# Altium PCB РАЗВОДКА.PcbDoc (part 2 of 2)
Units mm, origin at the board's own origin, x right, y up, seen from the top; angles counter-clockwise.
Board outline 81.25 x 50.02 mm, 2 copper layers (Top Layer, Bottom Layer); 68 components, 46 nets, 302 pads, 66 vias.
Unrouted connection lines stored in the file: 1.
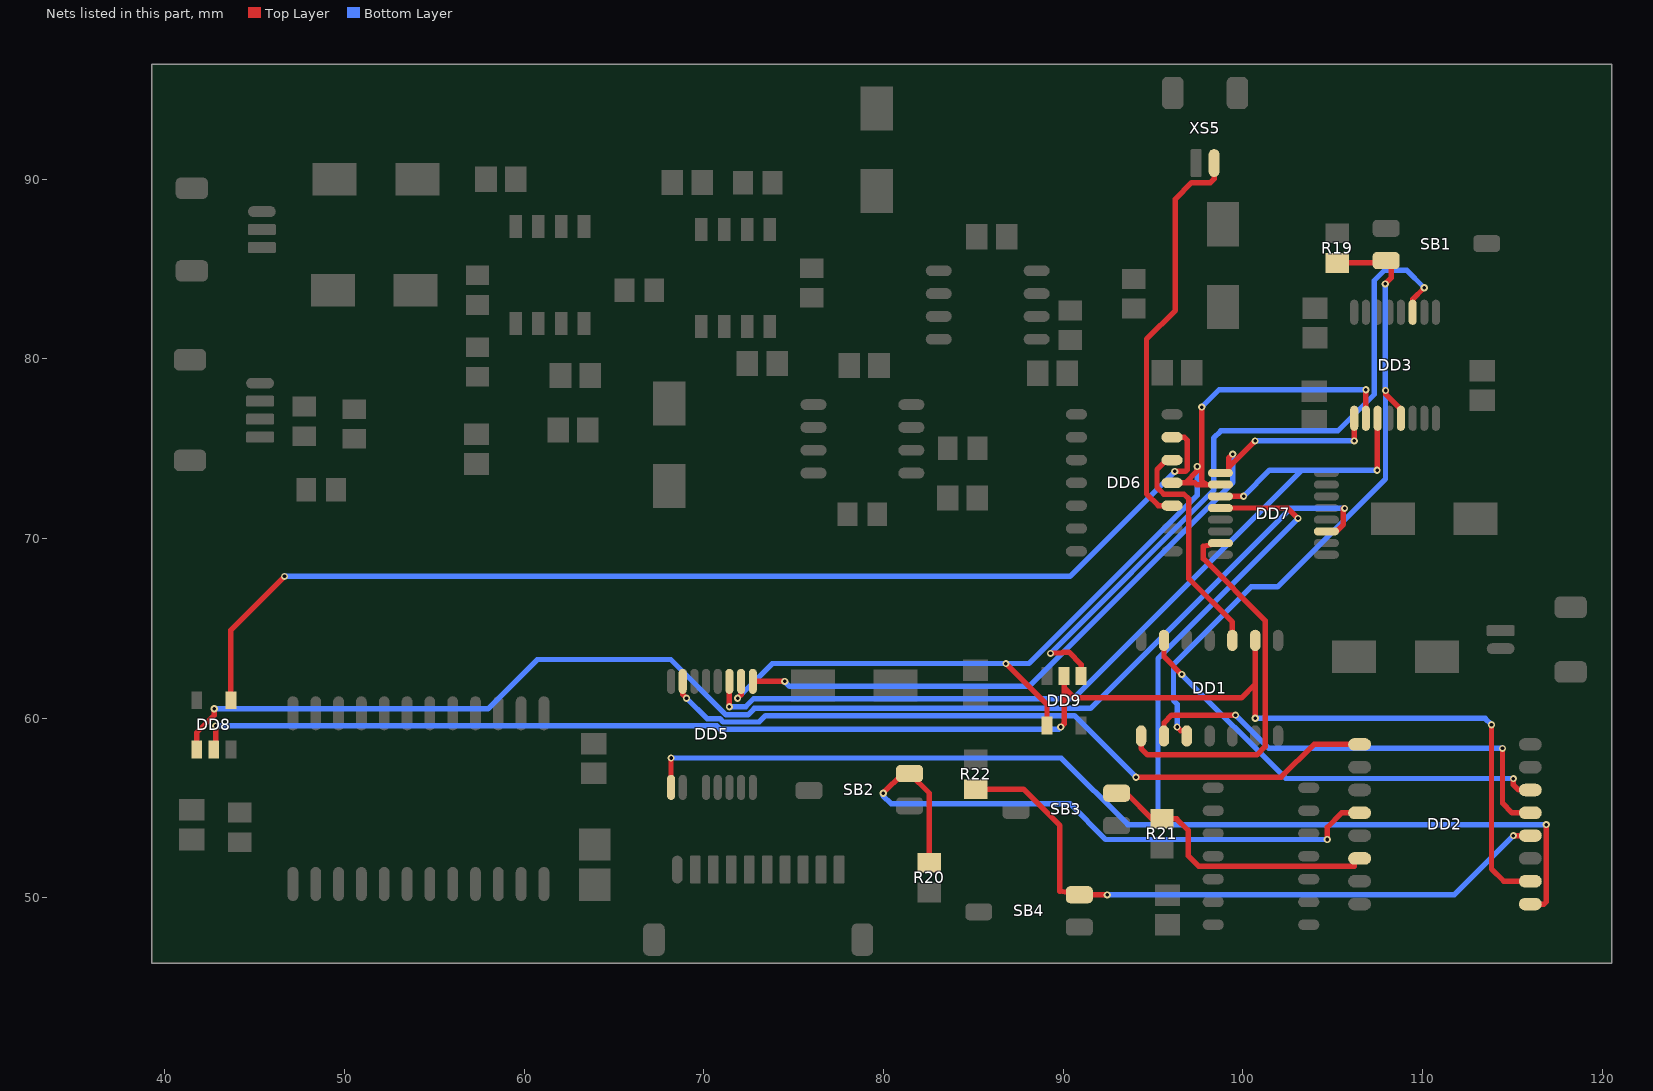
[diagram p2: the nets of this part, all layers, seen from the top]

## Via types
v1: diameter 0.4, hole 0.2, Top Layer to Bottom Layer, 62 vias
v2: diameter 3.8, hole 3.8, Top Layer to Bottom Layer, 4 vias

## Nets (pads, with @x,y where several pads share a name; then routed paths per layer and width w, separated by ;. In a path a pad name is that pad's centre, name@x,y a point inside that pad or via, vN(x,y) a via of type N, cw(c..) or ccw(c..) an arc to the next point about the centre after c; other vN are vias at no path point) (continued)
NetDD1_2: DD1.2 DD2.10 DD8.2 DD9.2 | length 90.8
  Top Layer w0.3: DD8.2@42.725,58.25 42.825,58.35 v1(42.825,59.575) ; v1(89.865,59.512) 90.05,59.697 90.05,61.715 ; DD9.2@90.05,62.35 90.05,61.715 ; v1(100.69,59.995) 100.69,61.9 ; DD1.2@100.69,64.335 100.69,61.9 ; v1(113.843,59.639) 113.843,51.613 114.531,50.925 DD2.10@116,50.925 ; 90.05,61.715 90.627,61.138 99.928,61.138 100.69,61.9
  Bottom Layer w0.3: v1(42.825,59.575) 70.723,59.575 70.907,59.391 89.744,59.391 v1(89.865,59.512) ; v1(100.69,59.995) 113.487,59.995 v1(113.843,59.639)
NetDD1_3: DD1.3 DD6.12 | length 13
  Top Layer w0.3: DD6.12@96.06,74.37 95.758,74.37 95.22,73.832 95.22,72.852 95.606,72.466 96.723,72.466 97,72.189 97,67.764 99.42,65.344 DD1.3@99.42,64.335
NetDD1_6: DD1.6 DD2.14 | length 24.6
  Top Layer w0.3: DD1.6@95.61,64.335 95.61,63.424 v1(96.596,62.438) ; v1(115.062,56.642) 115.062,56.286 115.343,56.005 DD2.14@116,56.005
  Bottom Layer w0.3: v1(96.596,62.438) 102.392,56.642 v1(115.062,56.642)
NetDD1_8: DD1.8 DD7.15 | length 21.5
  Top Layer w0.3: DD1.8@94.34,59.015 94.34,58.314 94.691,57.963 100.787,57.963 101.244,58.42 101.244,65.44 97.8,68.885 97.8,69.571 DD7.15@98.75,69.75
NetDD1_9: DD1.9 DD2.13 | length 25.3
  Top Layer w0.3: DD1.9@95.61,59.015 95.61,59.745 96.037,60.172 v1(99.594,60.172) ; v1(114.452,58.318) 114.452,55.27 114.988,54.735 DD2.13@116,54.735
  Bottom Layer w0.3: v1(99.594,60.172) 101.448,58.318 v1(114.452,58.318)
NetDD1_10: DD1.10 DD3.13 R19.1 SB1.2 | length 37.9
  Top Layer w0.3: v1(96.342,59.512) 96.545,59.309 96.88,59.309 DD1.10@96.88,59.015 ; R19.1@105.25,85.344 107.85,85.344 SB1.2@107.975,85.469 108.255,85.469 108.255,84.506 v1(107.925,84.176) ; v1@107.925,78.232 v1@107.925,78.283 ; v1@107.981,78.238 v1(107.944,78.238) 107.963,78.219 107.963,78.028 108.8,77.191 DD3.13@108.8,76.694
  Bottom Layer w0.3: v1(96.342,59.512) 96.342,60.782 96.139,60.985 96.139,62.992 100.457,67.31 101.932,67.31 107.944,73.322 v1(107.944,78.238) 107.925,78.257 v1(107.925,84.176)
NetDD2_1: DD2.1 DD5.15 | length 41.4
  Top Layer w0.3: DD5.15@68.825,62.05 68.825,61.325 v1(69.037,61.112) ; v1(94.056,56.718) 102.135,56.718 103.962,58.545 DD2.1@106.5,58.545
  Bottom Layer w0.3: v1(69.037,61.112) 70.175,59.975 70.888,59.975 71.073,59.791 73.082,59.791 73.439,60.147 90.627,60.147 v1(94.056,56.718)
NetDD2_4: DD2.4 R20.1 SB2.2 | length 36
  Top Layer w0.3: v1(79.985,55.829) 81.08,56.925 SB2.2@81.45,56.925 82.55,55.825 R20.1@82.55,51.95 ; v1(104.7,53.25) 104.7,53.932 105.503,54.735 DD2.4@106.5,54.735
  Bottom Layer w0.3: v1(79.985,55.829) 79.985,55.677 80.416,55.245 90.373,55.245 92.368,53.25 v1(104.7,53.25)
NetDD2_6: DD2.6 R21.1 SB3.2 | length 16.5
  Top Layer w0.3: SB3.2@92.975,55.825 93.523,55.825 94.948,54.4 R21.1@95.5,54.4 96.317,54.4 96.952,53.765 96.952,52.349 97.536,51.765 106.197,51.765 106.197,52.195 DD2.6@106.5,52.195
NetDD2_9: DD2.9 DD5.1 DD7.12 | length 82.2
  Top Layer w0.3: DD5.1@68.175,56.15 v1(68.175,57.785) ; DD7.12@98.75,71.7 102.493,71.7 v1(103.073,71.12) ; DD2.9@116,49.655 116.762,49.655 116.891,49.784 v1(116.891,54.077)
  Bottom Layer w0.3: v1(68.175,57.785) 89.891,57.785 93.599,54.077 95.91,54.077 ; v1(103.073,71.12) 95.275,63.322 95.275,54.712 95.91,54.077 ; v1(116.891,54.077) 95.91,54.077
NetDD2_12: DD2.12 R22.1 SB4.2 | length 36.8
  Top Layer w0.3: R22.1@85.125,56.05 87.79,56.05 89.814,54.026 89.814,50.378 SB4.2@90.9,50.175 92.446,50.175 v1(92.456,50.165) ; v1(115.062,53.465) DD2.12@116,53.465
  Bottom Layer w0.3: v1(92.456,50.165) 111.762,50.165 v1(115.062,53.465)
NetDD3_3: DD3.3 DD9.1 | length 39.7
  Top Layer w0.3: v1(89.297,63.611) 89.316,63.63 89.943,63.63 89.991,63.678 90.314,63.678 91,62.992 DD9.1@91,62.35 ; DD3.3@109.45,82.594 109.45,83.312 v1(110.097,83.959)
  Bottom Layer w0.3: v1(89.297,63.611) 98.374,72.688 98.374,75.59 98.781,75.997 105.283,75.997 107.315,78.029 107.315,84.353 107.899,84.938 109.118,84.938 v1(110.097,83.959)
NetDD3_9: DD3.9 DD5.9 DD7.9 | length 43.6
  Top Layer w0.3: DD5.9@72.725,62.05 72.725,62.052 v1(74.498,62.052) ; DD7.9@98.75,73.65 99.212,73.65 99.212,73.965 ; v1(99.441,74.701) 99.212,74.473 99.212,73.965 ; v1(100.686,75.438) 99.212,73.965 ; v1(106.2,75.438) DD3.9@106.2,76.694
  Bottom Layer w0.3: v1(74.498,62.052) 74.778,61.773 88.096,61.773 99.441,73.118 v1(99.441,74.701) ; v1(100.686,75.438) v1(106.2,75.438)
NetDD3_10: DD3.10 DD5.10 DD6.11 DD7.10 DD9.4 | length 56.7
  Top Layer w0.3: v1(71.882,61.112) 72.075,61.305 DD5.10@72.075,62.05 ; v1(86.814,63.043) 89.1,60.757 DD9.4@89.1,59.6 ; DD6.11@96.06,73.1 96.797,73.1 ; v1(97.459,74.008) 97.459,73.762 96.797,73.1 ; v1(97.714,77.318) 97.714,73.229 97.942,73 ; DD7.10@98.75,73 97.942,73 ; DD3.10@106.85,76.694 v1(106.85,78.283) ; 96.797,73.1 97.333,73.1 97.433,73 97.942,73
  Bottom Layer w0.3: v1(71.882,61.112) 73.812,63.043 v1(86.814,63.043) 88.093,63.043 97.459,72.409 v1(97.459,74.008) ; v1(97.714,77.318) 98.679,78.283 v1(106.85,78.283)
NetDD3_11: DD3.11 DD5.11 DD7.11 | length 51
  Top Layer w0.3: v1(71.425,60.641) DD5.11@71.425,62.05 ; DD7.11@98.75,72.35 v1(100.04,72.35) ; v1(107.475,73.805) 107.487,73.818 107.487,76.681 DD3.11@107.5,76.694
  Bottom Layer w0.3: v1(71.425,60.641) 72.332,60.641 72.779,61.087 90.576,61.087 103.295,73.805 ; v1(100.04,72.35) 101.495,73.805 103.295,73.805 ; v1(107.475,73.805) 103.295,73.805
NetDD6_10: DD6.10 XS5.1 | length 22.3
  Top Layer w0.3: DD6.10@96.06,71.83 95.301,71.83 94.64,72.49 94.64,81.102 96.241,82.702 96.241,88.9 97.155,89.814 98.197,89.814 98.4,90.018 XS5.1@98.4,90.9
NetDD6_13: DD6.13 DD8.4 | length 63.4
  Top Layer w0.3: DD8.4@43.675,61 43.675,64.909 v1(46.66,67.894) ; DD6.13@96.06,75.64 96.749,75.64 96.9,75.489 96.9,73.838 96.798,73.736 v1(96.215,73.736)
  Bottom Layer w0.3: v1(46.66,67.894) 90.373,67.894 v1(96.215,73.736)
NetDD7_3: DD7.3 DD8.1 | length 74.8
  Top Layer w0.3: DD8.1@41.775,58.25 41.775,59.199 42.75,60.174 v1(42.75,60.525) ; DD7.3@104.65,70.4 105.207,70.4 105.6,70.793 105.6,71.679 v1(105.664,71.679)
  Bottom Layer w0.3: v1(42.75,60.525) 57.985,60.525 60.731,63.271 68.158,63.271 71.239,60.191 72.448,60.191 72.811,60.554 91.517,60.554 102.642,71.679 v1(105.664,71.679)
pads on no net: DA6.5 DA6.8 DA7.5 DA7.8 DA33.2 DA33.3 DA33.4 DA33.5 DA33.23 DD1.11 DD1.12 DD1.13 DD2.2 DD2.3 DD2.5 DD2.7 DD2.11 DD2.15 DD3.6 DD4.1 DD4.2 DD4.3 DD4.4 DD4.5 DD4.6 DD4.8 DD4.9 DD4.10 DD4.11 DD4.12 DD4.13 DD5.6 DD6.1 DD6.2 DD6.3 DD6.4 DD6.5 DD6.6 DD6.7 DD6.8 DD6.9 DD6.14 DD7.6 DD8.3 DD9.3 SB1.3 SB2.3 SB3.3 SB4.3 XS1.11 XS1.12 XS2.3 XS2.4 XS3.4 XS3.5 XS4.5 XS4.6 XS5.3 XS5.4
copper on no net:
  other v2: 42.3,49.2 117.675,70.725 116.8,93 42.3,93.55

## Polygon pours and split planes (outlines as drawn)
"+5V A" on Bottom Layer "+5V_A_L02_P018" (solid, pour order 18): 39.275,65.625 89.2,65.625 89.2,78.1 91.475,78.1 91.475,81.8 91.5,81.775 94.875,81.775 94.875,96.375 39.275,96.375
no net on Bottom Layer "NONET_L02_P017" (solid, pour order 17): 39.275,65.625 89.2,65.625 89.2,78.1 91.475,78.1 91.475,81.8 91.5,81.775 94.875,81.775 94.875,96.375 39.275,96.375
D on Bottom Layer "D_L02_P015" (solid, pour order 15): 39.275,65.2 39.275,46.375 120.5,46.375 120.525,46.4 120.5,46.425 120.5,96.375 95.35,96.375 95.3,96.325 95.3,81.5 91.9,81.5 91.9,77.7 92.1,77.5 89.6,77.5 89.6,65.2
A on Bottom Layer "GND A" (solid, shelved, pour order 7): 39.275,46.375 39.275,96.4 142.075,96.4 142.075,46.375
A on Top Layer "A_L01_P016" (solid, pour order 16): 39.275,65.625 89.2,65.625 89.2,78.1 91.475,78.1 91.475,81.8 91.5,81.775 94.875,81.775 94.875,96.375 39.275,96.375
"+5V D" on Top Layer "+5V_D_L01_P014" (solid, pour order 14): 39.275,65.2 39.275,46.375 120.5,46.375 120.525,46.4 120.5,46.425 120.5,96.375 95.35,96.375 95.3,96.325 95.3,81.5 91.9,81.5 91.9,77.7 92.1,77.5 89.6,77.5 89.6,65.2
A on Top Layer "GND A" (solid, shelved, pour order 6): 38.981,46.316 38.981,96.341 141.781,96.341 141.781,46.316

## Other copper
Top Layer:
  pour cut-out: 89.6,67.639 90.479,67.639 96.283,73.444 96.323,73.444 96.521,73.642 96.521,73.83 96.431,73.92 96.431,73.952 96.399,73.952 96.332,74.019 96.065,74.019 95.923,73.876 95.923,73.804 90.268,68.149 89.6,68.149
Bottom Layer:
  pour cut-out: 50.113,65.625 50.623,65.625 50.623,73.046 51.63,74.053 51.702,74.053 51.702,74.086 51.792,74.176 51.792,74.363 51.702,74.453 51.702,74.486 51.683,74.486 51.419,74.75 51.331,74.75 51.331,74.556 50.113,73.338
  pour cut-out: 44.917,65.625 44.917,65.694 44.868,65.742 46.728,67.602 46.767,67.602 46.942,67.777 46.942,68.044 46.81,68.177 46.51,68.177 46.377,68.044 46.377,67.972 44.03,65.625
  pour cut-out: 64.13,65.625 63.62,65.625 63.62,71.173 61.665,73.129 61.665,73.234 61.645,73.254 61.645,75.144 62.282,74.507 62.224,74.449 62.178,74.449 62.178,73.382 62.155,73.359 64.11,71.404 64.11,71.298 64.13,71.279
  pour cut-out: 61.355,65.625 60.845,65.625 60.845,70.862 60.555,71.153 60.555,71.258 60.535,71.278 60.535,81.235 61.045,81.235 61.045,71.383 61.335,71.093 61.335,70.987 61.355,70.968
  pour cut-out: 95.3,96.85 94.9,96.85 94.9,81.8 92.608,81.8 91.5,81.8 91.5,78.1 89.792,78.1 89.2,78.1 89.2,65.6 63.675,65.6 39.275,65.6 39.275,65.2 64.075,65.2 89.6,65.2 89.6,77.692 91.9,77.692 91.9,81.5 95.3,81.5
  pour cut-out: 89.725,77.5 89.687,77.5 89.6,77.587 89.704,77.692 89.917,77.692 89.725,77.5 89.687,77.5 89.6,77.587
  pour cut-out: 89.6,77.587 89.704,77.692 89.917,77.692 89.725,77.5 91.975,77.5 91.975,77.617 91.9,77.692 89.6,77.692

## Silkscreen, mask and mechanical layers (free items; w line width, h text height)
Top Overlay:
  lines w0.1: 48.75,74.825 48.75,78.175 46.8,78.175 46.8,74.85 48.75,74.85 ; 51.5,74.8 51.5,78.15 49.55,78.15 49.55,74.825 51.5,74.825 ; 83.525,49.475 83.525,52.825 81.575,52.825 81.575,49.5 83.525,49.5 ; 102.625,64.669 102.625,66.619 ; 40.525,52.425 42.475,52.425 42.475,55.75 40.525,55.75 40.525,52.425 ; 43.2,52.3 43.2,55.625 45.15,55.625 45.15,52.3 43.2,52.3 ; 47,71.75 50.325,71.75 50.325,73.7 47,73.7 47,71.75 ; 56.329,73.2 58.279,73.2 58.279,76.525 56.329,76.525 56.329,73.2 ; 56.379,78.15 56.379,81.475 58.329,81.475 58.329,78.15 56.379,78.15 ; 56.454,82.2 56.454,85.525 58.404,85.525 58.404,82.2 56.454,82.2 ; 56.975,89.075 56.975,91.025 60.3,91.025 60.3,89.075 56.975,89.075 ; 61.125,75.05 64.45,75.05 64.45,77 61.125,77 61.125,75.05 ; 61.225,78.025 61.225,79.975 64.55,79.975 64.55,78.025 61.225,78.025 ; 62.725,49.5 65.125,49.5 65.125,54.15 62.725,54.15 62.725,49.5 ; 62.875,56 62.875,59.325 64.825,59.325 64.825,56 62.875,56 ; 64.759,82.8 68.084,82.8 68.084,84.675 64.759,84.675 64.759,82.8 ; 67.35,88.825 67.35,90.775 70.675,90.775 70.675,88.825 67.35,88.825 ; 71.2,88.8 71.2,90.75 74.525,90.75 74.525,88.8 71.2,88.8 ; 71.7,78.8 71.7,80.75 75.025,80.75 75.025,78.8 71.7,78.8 ; 74.95,82.6 74.95,85.925 77.025,85.925 77.025,82.6 74.95,82.6 ; 77.175,70.4 77.175,72.35 80.5,72.35 80.5,70.4 77.175,70.4 ; 77.25,78.625 77.25,80.575 80.575,80.575 80.575,78.625 77.25,78.625 ; 82.725,74.025 82.725,75.975 86.05,75.975 86.05,74.025 82.725,74.025 ; 82.8,71.3 82.8,73.25 86.125,73.25 86.125,71.3 82.8,71.3 ; 84.075,55.15 84.075,58.475 86.025,58.475 86.025,55.15 84.075,55.15 ; 84.125,60.225 84.125,63.55 86.075,63.55 86.075,60.225 84.125,60.225 ; 84.325,85.875 84.325,87.825 87.65,87.825 87.65,85.875 84.325,85.875 ; 87.8,78.2 87.8,80.15 91.125,80.15 91.125,78.2 87.8,78.2 ; 89.5,80.475 89.5,83.875 91.45,83.875 91.45,80.475 89.5,80.475 ; 93,82 93,85.325 94.95,85.325 94.95,82 93,82 ; 94.525,51.944 96.475,51.944 96.475,55.269 94.525,55.269 94.525,51.944 ; 94.675,78.175 94.675,80.125 98,80.125 98,78.175 94.675,78.175 ; 94.875,47.725 96.825,47.725 96.825,51.05 94.875,51.05 94.875,47.725 ; 103.025,75.694 103.025,79.019 104.975,79.019 104.975,75.694 103.025,75.694 ; 103.05,80.369 103.05,83.694 105,83.694 105,80.369 103.05,80.369 ; 104.275,84.344 104.275,87.669 106.225,87.669 106.225,84.344 104.275,84.344 ; 112.225,76.819 112.225,80.144 114.175,80.144 114.175,76.819 112.225,76.819
Bottom Overlay:
  lines w0.254: 35.175,94.85 35.675,96.45 ; 35.191,47.822 35.675,46.275 ; 35.7,96.5 35.7,46.27 39.17,46.27 ; 35.741,46.353 36.225,47.9 ; 35.75,96.4 36.234,94.853 ; 39.15,42.825 120.55,42.825 ; 39.2,42.8 40.8,42.3 ; 39.25,42.875 40.797,43.359 ; 119,43.35 120.547,42.866 ; 119.078,42.316 120.625,42.8 ; 120.65,42.866 120.65,46.695
  lines w0.3: 35.7,96.5 39.2,96.5 ; 39.15,42.825 39.15,46.325
  lines w0.5: 39.275,46.375 39.275,96.4 120.525,96.4 120.525,46.375 39.3,46.375
  text "50" at 34.85,69.275 h1.52 r90
  text "105" at 88.525,43.825 h1.52
Mechanical 7:
  lines w0.254: 201.1,2423.6 201.1,2411.525 211.275,2411.525 211.275,2423.575 201.125,2423.575 ; 54.25,2455.725 54.275,2455.75 64.375,2455.75 64.375,2471.2 54.25,2471.2 54.25,2455.725 ; 55.35,2438.15 63.025,2438.15 63.075,2438.2 63.075,2449.25 55.35,2449.25 55.35,2438.15 ; 113.975,2385.6 114,2385.575 123.975,2385.575 124.025,2385.625 124.025,2393.85 113.975,2393.85 113.975,2392.325 113.975,2385.6
  text "BOASFORMAT|А3|101|0|883070867|165354330|1000000000|2:1|" at 0,2540 h0
  text "DimPos|235698819|977667323|-1988189|-11072834|3|1537097" at 180.8,2494.75 h0
  text "DimPos|238513780|976338583|-5039370|-12401574|53|2865525" at 195.7,2494.75 h0
  text "DimPos|242893701|976919291|-5127953|-10669292|5|1742827" at 207.05,2491.825 h0
  text "DimPos|224124016|976584646|-2726378|-10836614|27|3406301" at 153.275,2491.4 h0
  text "DimPos|195767717|980561024|3307087|-6446850|3|1537097" at 65.925,2490.35 h0
  text "DimPos|218592520|981466535|826772|-6200788|3|1537097" at 123.8,2488.3 h0
  text "DimPos|210236220|978986220|6368110|-7027560|17|2409980" at 94.9,2487.825 h0
  text "DimPos|213631890|978986220|2234252|-7027560|55|3071255" at 114.025,2487.825 h0
  text "DimPos|229419291|974685039|-2647638|-10580709|41|2736209" at 166.525,2485.925 h0
  text "DimPos|241318898|969724409|-14055118|-11742126|23|3030109" at 225.725,2476.275 h0
  text "DimPos|189566929|977332677|4714567|-1820866|13|2033788" at 46.6,2470.4 h0
  text "DimPos|244881890|969399606|-10748031|-4960630|17|2409980" at 226.375,2458.225 h0
  text "DimPos|242559055|965098425|-16210630|-6525591|3|1537097" at 234.35,2451.275 h0
  text "DimPos|189320866|969311024|6692913|1318898|15|2239518" at 40.95,2442.05 h0
  text "DimPos|235285433|957903543|-21830709|-7194882|33|2865525" at 230.15,2434.7 h0
  text "DimPos|244301181|958651575|-17027559|-3061023|3|1537097" at 240.85,2426.1 h0
  text "DimPos|189320866|955757874|7194882|1988189|37|3241717" at 39.675,2405.925 h0
  text "DimPos|248021654|956751969|-12982283|7027560|9|1454805" at 240.025,2395.65 h0
  text "DimPos|188907480|950629921|8346456|2559055|17|2409980" at 35.7,2391.45 h0
  text "DimPos|189980315|950216535|1564961|7933070|49|3115340" at 55.65,2376.75 h0
  text "DimPos|222618110|952352362|7047244|10521653|53|2865525" at 124.625,2375.6 h0
  text "DimPos|205777559|953356299|6289370|11407480|17|2409980" at 85.096,2374.82 h0
  text "DimPos|224872047|948415354|1968504|7421260|5|1742827" at 143.25,2373.475 h0
  text "DimPos|226702756|950570866|3868110|9596457|5|1742827" at 143.075,2373.425 h0
  text "DimPos|205856299|948484252|1574803|7608268|19|2283603" at 97.875,2371.295 h0
  text "DimPos|198661417|949222441|4212598|9753937|25|3235839" at 67.269,2370.27 h0
  text "DimPos|244931102|947814961|-11240158|8631890|39|3115340" at 227.75,2368.875 h0
  text "DimPos|220639764|947687008|5994095|10196851|53|2865525" at 122.275,2364.575 h0
  text "DimPos|231318898|946397638|3572835|10787402|17|2409980" at 155.55,2359.8 h0
  text "DimPos|234143701|946397638|-748031|10856299|35|3071255" at 173.7,2359.625 h0
  text "DimPos|230797244|949753937|10787401|14370079|53|2865525" at 135.9,2359.225 h0
  text "DimPos|211397638|953188976|3809055|18435039|23|3030109" at 104.35,2357.625 h0
  text "SET2|Superlayer=MechanicalLayer7|Wsuperlayer=MechanicalLayer8|Layergrid=MechanicalLayer9|Werase=MechanicalLayer11|Layermark=MechanicalLayer12|Layerstamp=MechanicalLayer13|Thinline=0,18|Basicline=0,6|Gridline=0,18|Boardline=0,6|Contourpolygonline=0,6|PcbGridStep=1,25|PcbGridCleareanceAtView=0|PcbGridNumberEach=l4|PcbGridLineEach=l2|PcbGridCountSecondaryStrip=1|PcbGridEnabledStrip=True|PcbSignalGridEnabled=True|PcbSignalShowBukva=True|RealSignalLayerNames=False|PcbGridEnabledBothSide=False|RealLayerNames=False|SilkShowPad=True|SilkViewName=Слой маркировки|SilkShowHole=True|SilkShowAxis=True|SilkShowBukva=True|SilkShowGrid=False|SolderShowGrid=False|SolderViewName=Слой маски|SolderShowAxis=False|SolderShowBukva=False|MainViewShowGrid=False|MainViewUseShapesDrill=False|ShowBukvaOnSboky=True|Density=2,2|TableName=Таблица 1|RazrezWidth=100|Sher=Rz 160|Asstoplayer=MechanicalLayer15|Asstoplayer2=None|Assbottomlayer=MechanicalLayer2|Assbottomlayer2=None|AssMinDiameterHoles=2|AssDim=True|AssMech=False|AssSilk=False|AssComponentSilk=False|AssFreeSilk=False|AssSmdPads=False|AssGridEnable=False|Mirror=Horisontal|PcbGridFontSize=5|PcbGridCenterZero=False|TTStampDistance=12|MainFontSize=5|PolyStep=2|PcbDrillDrawingGridEnabled=False|PcbDrillDrawingViewName=Слой сверловки|PcbDrillDrawingShowBukva=False|PcbDrillDrawingShowAxis=False|PcbSignalLayersUseDrill=False|PcbSignalLayersUseShapesDrill=False|PcbSignalLayersShowAxis=False" at 0,0.025 h0
  text "2TT0007#  8 Клеймить." at 0,0 h0
  text "2TT0006#  7 Маркировать обозначение и заводской номер печатного узла черной краской МКЭ ОСТ 4ГО.054.2050М2 шрифтом 3,5 или 5 тип А ГОСТ 2.304-81, вместе, удобном для чтения." at 0,0 h0
  text "2TT0005#  6 Покрытие лак УР-231 ТУ6-21-14-90(3). Допускается покрытие лаком ЭП-730 ГОСТ 20824-81(3)." at 0,0 h0
  text "2TT0004#  5 Элементы поверхностного монтажа паять припойной пастой ПОС-61 ЛОК ТУ 400 К''Р''-1805-22-91, флюс ФПС-3 ТУ400 СП \"ЭВ\"-2178-137-98." at 0,0 h0
  text "2TT0003#  4 Меры защиты от статического электричества по ОСТ 92-1615-74. Степень жесткости II по ОСТ11.073.062-2001." at 0,0 h0
  text "2TT0002#  3** Размеры обеспеч. инстр." at 0,0 h0
  text "2TT0001#  2* Размеры для справок." at 0,0 h0
  text "2TT0000#  1 Установку элементов производить по чертежу." at 0,0 h0
  text "TT0008#  9 Покрытие проводящего рисунка платы Хим. Мм." at 0,0 h0
  text "TT0007#  8 Допускается полное или частичное заполнение припоем переходных отверстий, их диаметры контролю не подлежат." at 0,0 h0
  text "TT0006#  7  Предельные отклонения расстояний между центрами отверстий ±0,2 мм, кроме оговоренных особо." at 0,0 h0
  text "TT0005#  6 Форма контактной площадки произвольная. Допускается занижение контактных площадок до 0,05 мм от края отверстия." at 0,0 h0
  text "TT0004#  5 Расстояние между печатными проводниками и контактными площадками не менее 0,2 мм." at 0,0 h0
  text "TT0003#  4 Печатная плата должна соответствовать ГОСТ Р 53429-2009, группе жесткости 3 при верхнем значении температуры окружающей среды (85±2) °С." at 0,0 h0
  text "TT0002#  3 Класс точности 3 по ГОСТ Р 53429-2009." at 0,0 h0
  text "TT0001#  2 ** Размер обеспеч. инстр." at 0,0 h0
  text "TT0000#  1 *  Размер для справок." at 0,0 h0
  text "BOASVIADRILLTABLE:triangle,78740,62,|none,1496063,4," at 0,0 h0
  text "2BOASDRILLTABLE:" at 0,0 h0
Mechanical 9:
  circle w0.6: c114.025,2404.45 r0.2
  circle w0.6: c101.875,2390.62 r0.2
  circle w0.6: c101.071,2403.795 r0.2
  circle w0.6: c77.969,2395.045 r0.2
  circle w0.6: c59.625,2396.9 r0.2
  circle w0.6: c56.9,2397.95 r0.2
  circle w0.6: c57.95,2410.975 r0.2
  circle w0.6: c57.95,2445.4 r0.2
  circle w0.6: c58.575,2465.775 r0.2
  circle w0.6: c74.325,2473.975 r0.2
  circle w0.6: c111.075,2469.975 r0.2
  circle w0.6: c119.7,2469.975 r0.2
  circle w0.6: c125.9,2472.55 r0.2
  circle w0.6: c159.8,2459.05 r0.2
  circle w0.6: c146.35,2463.875 r0.2
  circle w0.6: c175.75,2466.625 r0.2
  circle w0.6: c182.9,2463.25 r0.2
  circle w0.6: c194.025,2464.725 r0.2
  circle w0.6: c199.075,2445.625 r0.2
  circle w0.6: c190.025,2446.45 r0.2
  circle w0.6: c193.175,2434.7 r0.2
  circle w0.6: c174.7,2416.425 r0.2
  circle w0.6: c197.6,2418.325 r0.2
  circle w0.6: c207.05,2413.5 r0.2
  circle w0.6: c142.525,2402.325 r0.2
  circle w0.6: c137.5,2390.475 r0.2
  circle w0.6: c148.25,2392.325 r0.2
  circle w0.6: c152.9,2397.8 r0.2
  circle w0.6: c163.3,2395.725 r0.2
  circle w0.6: c164.625,2387.2 r0.2
  circle w0.6: c171.8,2387.2 r0.2
  circle w0.6: c199.2,2390.8 r0.2
  lines w0.18: 24.579,2391.45 35.7,2391.45 56.9,2397.95 ; 26.441,2405.925 39.675,2405.925 57.95,2410.975 ; 30.262,2442.05 40.95,2442.05 57.95,2445.4 ; 36.434,2470.4 46.6,2470.4 58.575,2465.775 ; 42.737,2376.75 55.65,2376.75 59.625,2396.9 ; 54.05,2370.27 67.269,2370.27 77.969,2395.045 ; 57.021,2490.35 65.925,2490.35 74.325,2473.975 ; 73.975,2374.82 85.096,2374.82 101.071,2403.795 ; 83.779,2487.825 94.9,2487.825 111.075,2469.975 ; 87.075,2371.295 97.875,2371.295 101.875,2390.62 ; 91.654,2357.625 104.35,2357.625 114.025,2404.45 ; 101.224,2487.825 114.025,2487.825 119.7,2469.975 ; 109.997,2364.575 122.275,2364.575 137.5,2390.475 ; 112.347,2375.6 124.625,2375.6 142.525,2402.325 ; 114.896,2488.3 123.8,2488.3 125.9,2472.55 ; 123.622,2359.225 135.9,2359.225 163.3,2395.725 ; 133.648,2373.425 143.075,2373.425 152.9,2397.8 ; 133.823,2373.475 143.25,2373.475 148.25,2392.325 ; 144.429,2359.8 155.55,2359.8 164.625,2387.2 ; 146.35,2463.875 153.275,2491.4 166.927,2491.4 ; 159.8,2459.05 166.525,2485.925 178.475,2485.925 ; 171.8,2387.2 173.7,2359.625 186.501,2359.625 ; 174.7,2416.425 230.15,2434.7 242.428,2434.7 ; 175.75,2466.625 180.8,2494.75 189.704,2494.75 ; 182.9,2463.25 195.7,2494.75 207.978,2494.75 ; 190.025,2446.45 225.725,2476.275 238.421,2476.275 ; 193.175,2434.7 234.35,2451.275 243.254,2451.275 ; 194.025,2464.725 207.05,2491.825 216.477,2491.825 ; 197.6,2418.325 240.85,2426.1 249.754,2426.1 ; 199.075,2445.625 226.375,2458.225 237.496,2458.225 ; 199.2,2390.8 227.75,2368.875 240.663,2368.875 ; 207.05,2413.5 240.025,2395.65 248.72,2395.65
  text "3" at 183.3,2497.28 h10.75
  text "53" at 198.2,2497.28 h10.75
  text "5" at 209.55,2494.355 h10.75
  text "27" at 155.775,2493.93 h10.75
  text "3" at 59.521,2492.88 h10.75
  text "3" at 117.396,2490.83 h10.75
  text "17" at 86.279,2490.355 h10.75
  text "55" at 103.724,2490.355 h10.75
  text "41" at 169.025,2488.455 h10.75
  text "23" at 228.225,2478.805 h10.75
  text "13" at 38.934,2472.93 h10.75
  text "17" at 228.875,2460.755 h10.75
  text "3" at 236.85,2453.805 h10.75
  text "15" at 32.762,2444.58 h10.75
  text "33" at 232.65,2437.23 h10.75
  text "3" at 243.35,2428.63 h10.75
  text "37" at 28.941,2408.455 h10.75
  text "9" at 242.525,2398.18 h10.75
  text "17" at 27.079,2393.98 h10.75
  text "49" at 45.237,2379.28 h10.75
  text "53" at 114.847,2378.13 h10.75
  text "17" at 76.475,2377.35 h10.75
  text "5" at 136.323,2376.005 h10.75
  text "5" at 136.148,2375.955 h10.75
  text "19" at 89.575,2373.825 h10.75
  text "25" at 56.55,2372.8 h10.75
  text "39" at 230.25,2371.405 h10.75
  text "53" at 112.497,2367.105 h10.75
  text "17" at 146.929,2362.33 h10.75
  text "35" at 176.2,2362.155 h10.75
  text "53" at 126.122,2361.755 h10.75
  text "23" at 94.154,2360.155 h10.75
Mechanical 13:
  lines w0.18: 230,2253 295,2253 ; 230,2258 295,2258 ; 230,2263 295,2263 ; 230,2268 295,2268 ; 230,2273 295,2273 ; 230,2288 295,2288 ; 230,2293 295,2293 ; 230,2298 295,2298 ; 369.96,2268 369.96,2283 ; 374.98,2268 374.98,2283
  lines w0.6: 8,2273 20,2273 ; 8,2308 20,2308 ; 8,2333 20,2333 ; 8,2358 20,2358 ; 8,2475 20,2475 ; 13,2248 13,2393 ; 13,2415 13,2535 ; 20,2393 8,2393 8,2248 20,2248 ; 20,2415 8,2415 8,2535 20,2535 ; 20,2521 90,2521 90,2535 ; 230,2248 230,2303 415,2303 ; 230,2278 295,2278 ; 230,2283 295,2283 ; 237,2278 237,2303 ; 247,2248 247,2303 ; 270,2248 270,2303 ; 285,2248 285,2303 ; 295,2248 295,2303 415,2303 ; 295,2263 365,2263 415,2263 ; 295,2288 415,2288 ; 365,2248 365,2288 ; 365,2268 415,2268 ; 365,2283 380,2283 415,2283 ; 380,2268 380,2288 ; 385.57,2263 385.57,2268 ; 397,2268 397,2288 ; 415,2311 415,2303 ; 20,2248 415,2248 415,2535 20,2535 ; 20,2248 20,2535
  text "Перв. примен." at 11.976,2494.373 h5.38 r90
  text "Справ. №" at 11.976,2437.78 h5.38 r90
  text "Подп. и дата" at 11.976,2365.961 h5.38 r90
  text "Инв. № дубл." at 11.976,2336.457 h5.38 r90
  text "Взам. инв. №" at 11.976,2311.496 h5.38 r90
  text "Лит." at 369.328,2284.024 h5.38
  text "Масса" at 384.108,2284.024 h5.38
  text "Масштаб" at 399.133,2284.024 h5.38
  text "Подп. и дата" at 11.976,2282.461 h5.38 r90
  text "Изм." at 230.687,2279.024 h5.38
  text "Лист" at 238.024,2279.024 h5.38
  text "№ докум." at 252.271,2279.024 h5.38
  text "Подп." at 273.92,2279.024 h5.38
  text "Дата" at 285.963,2279.024 h5.38
  text "Разраб." at 230.533,2273.771 h5.38
  text "2:1" at 402.916,2273.391 h7.68
  text "Пров." at 230.533,2268.771 h5.38
  text "Т.контр." at 230.533,2263.771 h5.38
  text "Лист" at 366.442,2263.771 h5.38
  text "Листов" at 387.485,2263.771 h5.38
  text "1" at 407.424,2263.771 h5.38
  text "Н.контр." at 230.533,2253.771 h5.38
  text "1 Установку элементов производить по чертежу. /   2* Размеры для справок. /   3** Размеры обеспеч. инстр. /   4 Меры защиты от статического электричества по ОСТ 92-1615-74. Степень жесткости II по ОСТ11.073.062-2001. /   5 Элементы поверхностного монтажа паять припойной пастой ПОС-61 ЛОК ТУ 400 К''Р''-1805-22-91, флюс ФПС-3 ТУ400 СП \"ЭВ\"-2178-137-98.  /   6 Покрытие лак УР-231 ТУ6-21-14-90(3). Допускается покрытие лаком ЭП-730 ГОСТ 20824-81(3). /   7 Маркировать обозначение и заводской номер печатного узла черной краской МКЭ ОСТ 4ГО.054.2050М2 шрифтом 3,5 или 5 тип А ГОСТ 2.304-81, вместе, удобном для чтения. /   8 Клеймить." at 35.975,2253.125 h7.68
  text "Инв. № подл." at 11.976,2251.457 h5.38 r90
  text "Утв." at 230.533,2248.771 h5.38
  text "Копировал" at 305.533,2243.771 h5.38
  text "Формат А3" at 386.625,2243.771 h5.38
Drill Drawing:
  lines w0.254: 35.675,96.45 35.675,46.22 39.145,46.22 ; 39.125,42.775 120.525,42.775 ; 39.175,42.75 40.775,42.25 ; 39.225,42.825 40.772,43.309 ; 118.975,43.7 120.522,43.216 ; 119.053,42.875 120.625,42.875 120.625,46.645
  lines w0.3: 35.675,96.45 39.175,96.45 ; 39.125,42.775 39.125,46.275
  lines w0.5: 39.25,46.325 39.25,96.35 120.45,96.35 120.45,46.325 39.275,46.325
  text "50" at 34.825,69.225 h1.52 r90
  text "105" at 88.5,43.775 h1.52

## Text inside footprints (layer, text, board x,y; h text height)
ZBOAS1866194480: Mechanical 7 "А(1)" at 124.543,2487.2 h15.36; Mechanical 7 "C5" at 163.806,2447.76 h4; Mechanical 7 "C6" at 54.21,2397.452 h4; Mechanical 7 "C7" at 141.301,2413.002 h4; Mechanical 7 "C8" at 179.199,2453.29 h4; Mechanical 7 "C9" at 179.061,2444.04 h4; Mechanical 7 "C10" at 162.239,2387.952 h4; Mechanical 7 "C11" at 197.469,2446.34 h4; Mechanical 7 "C13" at 85.466,2439.252 h4; Mechanical 7 "C14" at 96.298,2441.402 h4; Mechanical 7 "C15" at 117.161,2448.802 h4; Mechanical 7 "C16" at 96.432,2447.444 h4; Mechanical 7 "C17" at 139.38,2433.802 h4; Mechanical 7 "C21" at 87.983,2469.302 h4; Mechanical 7 "C22" at 142.46,2462.902 h4; Mechanical 7 "C23" at 128.372,2448.552 h4; Mechanical 7 "C18" at 149.479,2447.702 h4; Mechanical 7 "C24" at 108.762,2468.952 h4; Mechanical 7 "DA33" at 77.921,2400.352 h4; Mechanical 7 "DA6" at 127.94,2440.172 h4; Mechanical 7 "DA7" at 141.731,2455.072 h4; Mechanical 7 "R11" at 128.333,2432.002 h4; Mechanical 7 "R10" at 139.303,2439.352 h4; Mechanical 7 "R13" at 103.44,2456.952 h4; Mechanical 7 "R12" at 122.518,2457.752 h4; Mechanical 7 "R15" at 85.333,2448.952 h4; Mechanical 7 "R16" at 151.404,2453.052 h4; Mechanical 7 "R14" at 116.712,2468.902 h4; Mechanical 7 "R17" at 85.253,2456.952 h4; Mechanical 7 "R18" at 158.393,2456.552 h4; Mechanical 7 "SB1" at 192.04,2462.14 h4; Mechanical 7 "SB2" at 127.617,2401.252 h4; Mechanical 7 "SB3" at 150.779,2399.052 h4; Mechanical 7 "SB4" at 146.719,2387.752 h4; Mechanical 7 "С1" at 192.58,2431.502 h4; Mechanical 7 "С2" at 168.906,2459.69 h4; Mechanical 7 "С3" at 188.219,2416.152 h4; Mechanical 7 "С12" at 73.936,2456.952 h4; Mechanical 7 "С19" at 106.78,2439.752 h4; Mechanical 7 "С25" at 129.665,2472.602 h4; Mechanical 7 "С20" at 73.893,2469.302 h4; Mechanical 7 "DD1" at 166.972,2412.652 h4; Mechanical 7 "DD2" at 192.773,2397.572 h4; Mechanical 7 "DD6" at 157.168,2435.727 h4; Mechanical 7 "DA5" at 93.341,2458.652 h4; Mechanical 7 "DA4" at 114.218,2458.302 h4; Mechanical 7 "DD3" at 187.811,2448.59 h4; Mechanical 7 "DD5" at 110.714,2407.502 h4; Mechanical 7 "DD7" at 173.608,2431.627 h4; Mechanical 7 "R19" at 181.004,2461.64 h4; Mechanical 7 "R20" at 135.367,2391.552 h4; Mechanical 7 "R21" at 161.447,2396.452 h4; Mechanical 7 "R22" at 140.524,2403.052 h4; Mechanical 7 "С4" at 128.059,2412.952 h4; Mechanical 7 "DD4" at 172.496,2393.707 h4; Mechanical 7 "XS1" at 116.419,2388.427 h4; Mechanical 7 "XS2" at 202.921,2418.052 h4; Mechanical 7 "XS4" at 56.973,2443.602 h4; Mechanical 7 "XS5" at 166.011,2475.127 h4; Mechanical 7 "XS3" at 57.083,2463.702 h4; Mechanical 7 "R23" at 58.736,2397.152 h4; Mechanical 7 "R25" at 71.389,2442.052 h4; Mechanical 7 "R26" at 67.768,2434.752 h4; Mechanical 7 "R27" at 65.708,2442.352 h4; Mechanical 7 "C28" at 98.193,2404.802 h4; Mechanical 7 "C29" at 98.254,2393.002 h4; Mechanical 7 "DD8" at 55.532,2408.552 h4; Mechanical 7 "DD9" at 150.593,2411.252 h4